# Altium PCB pcb.PcbDoc
Units mil, origin at the board's own origin, x right, y up, seen from the top; angles counter-clockwise.
Board outline 2500 x 3500 mil, 4 copper layers (Top, Top Inner, Bot Inner, Bot), stack 61.834 mil thick; 74 components, 64 nets, 256 pads, 540 vias.
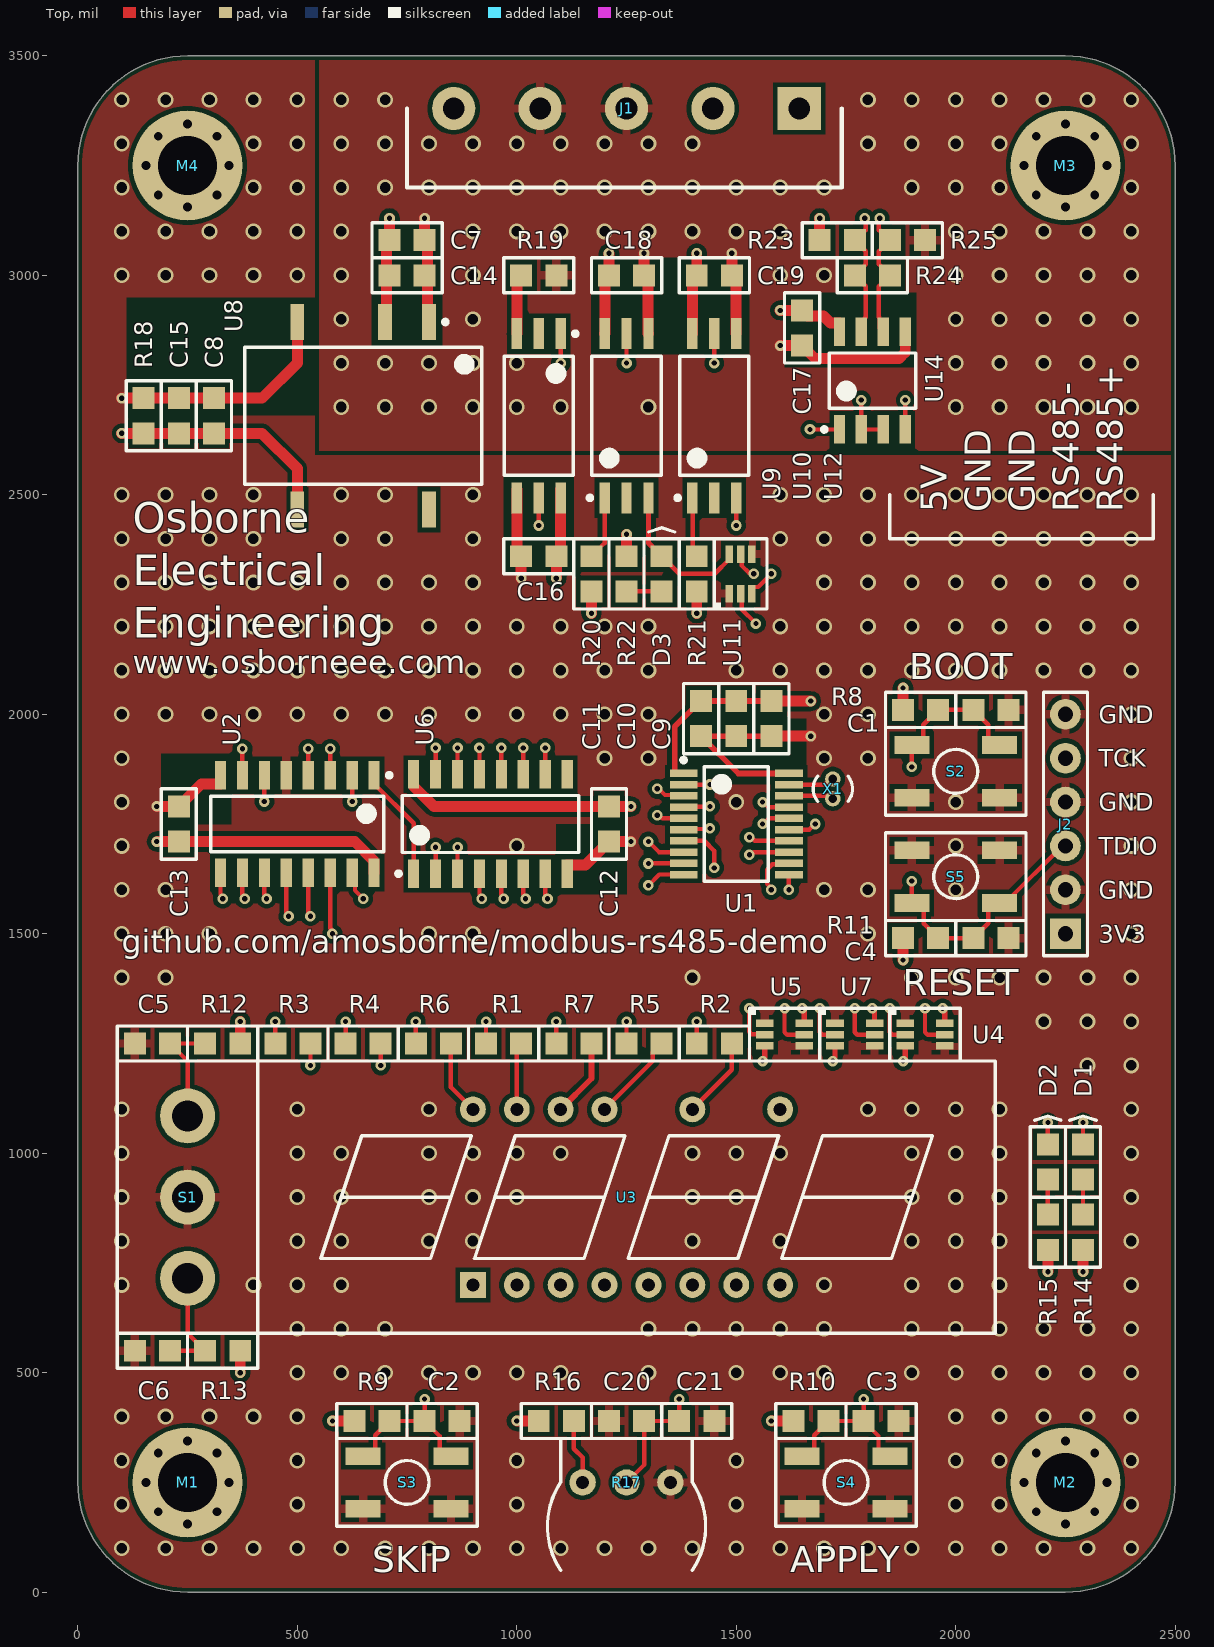
[diagram p0: Top view]
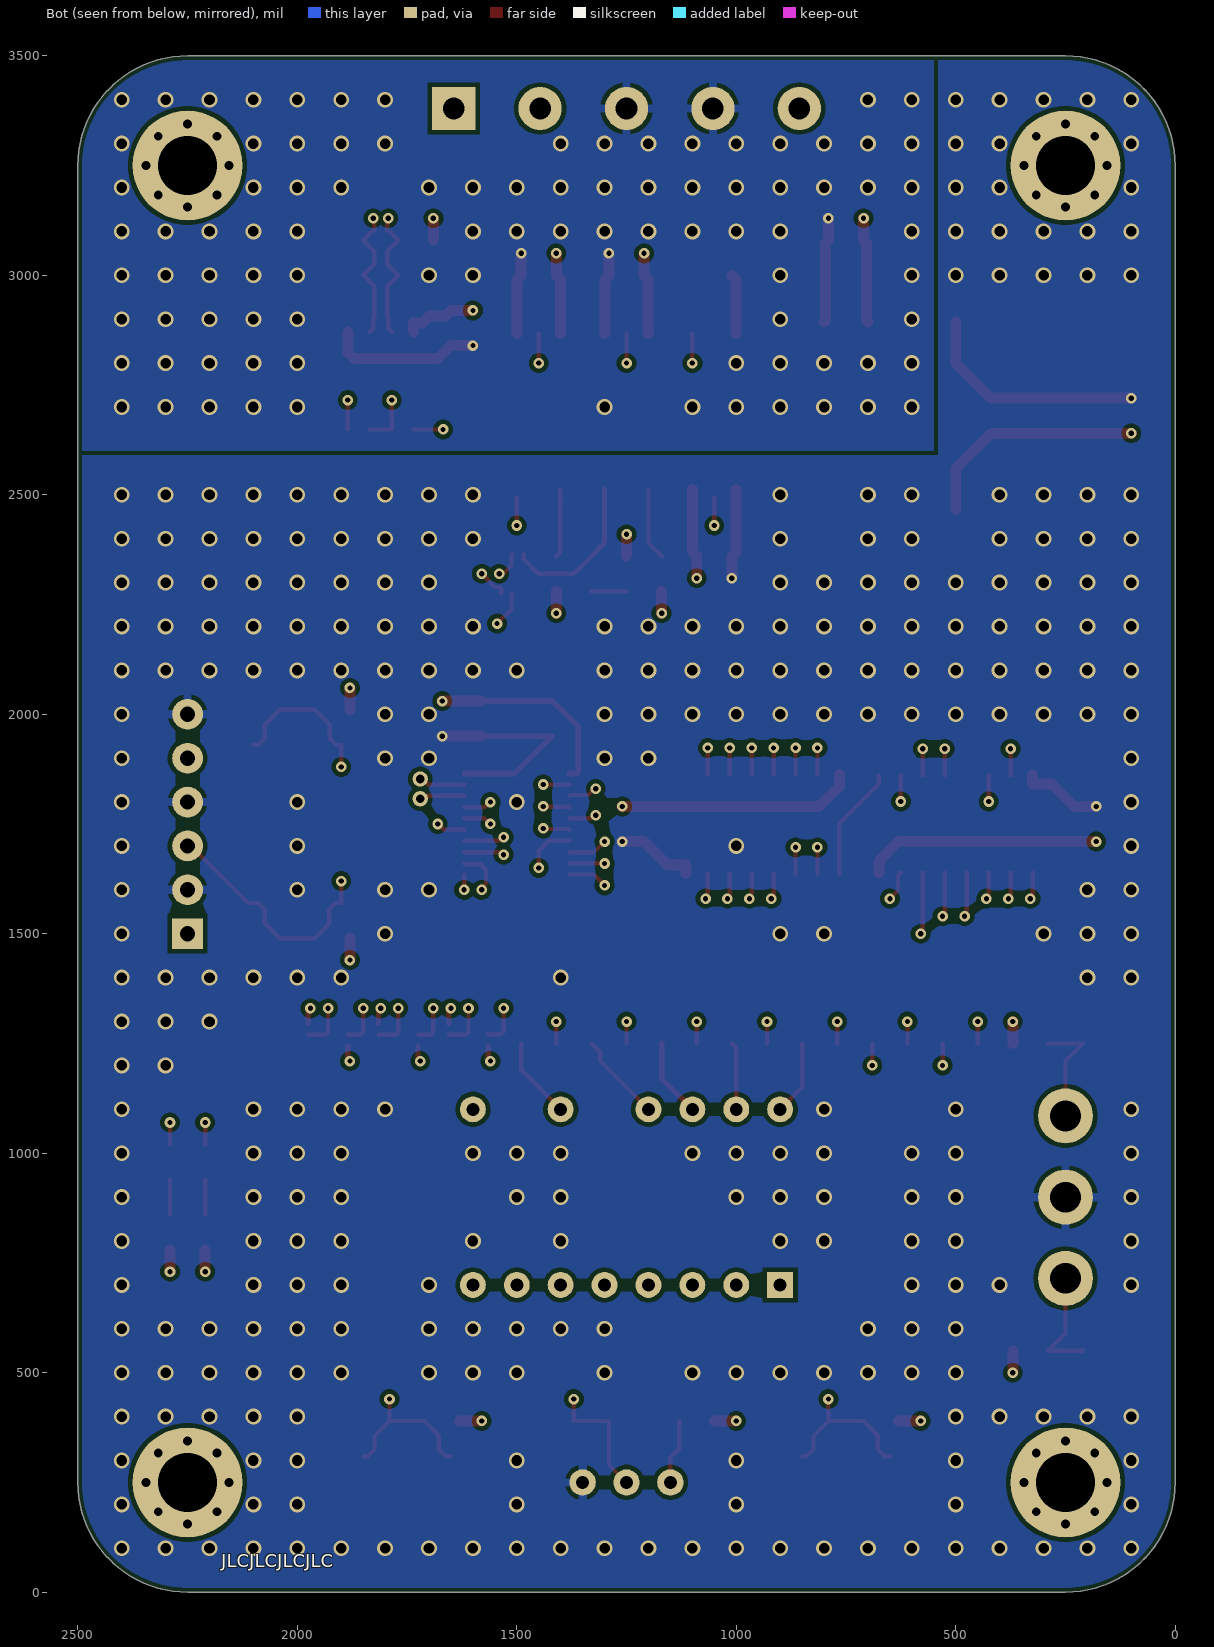
[diagram p1: Bot view, seen from below]
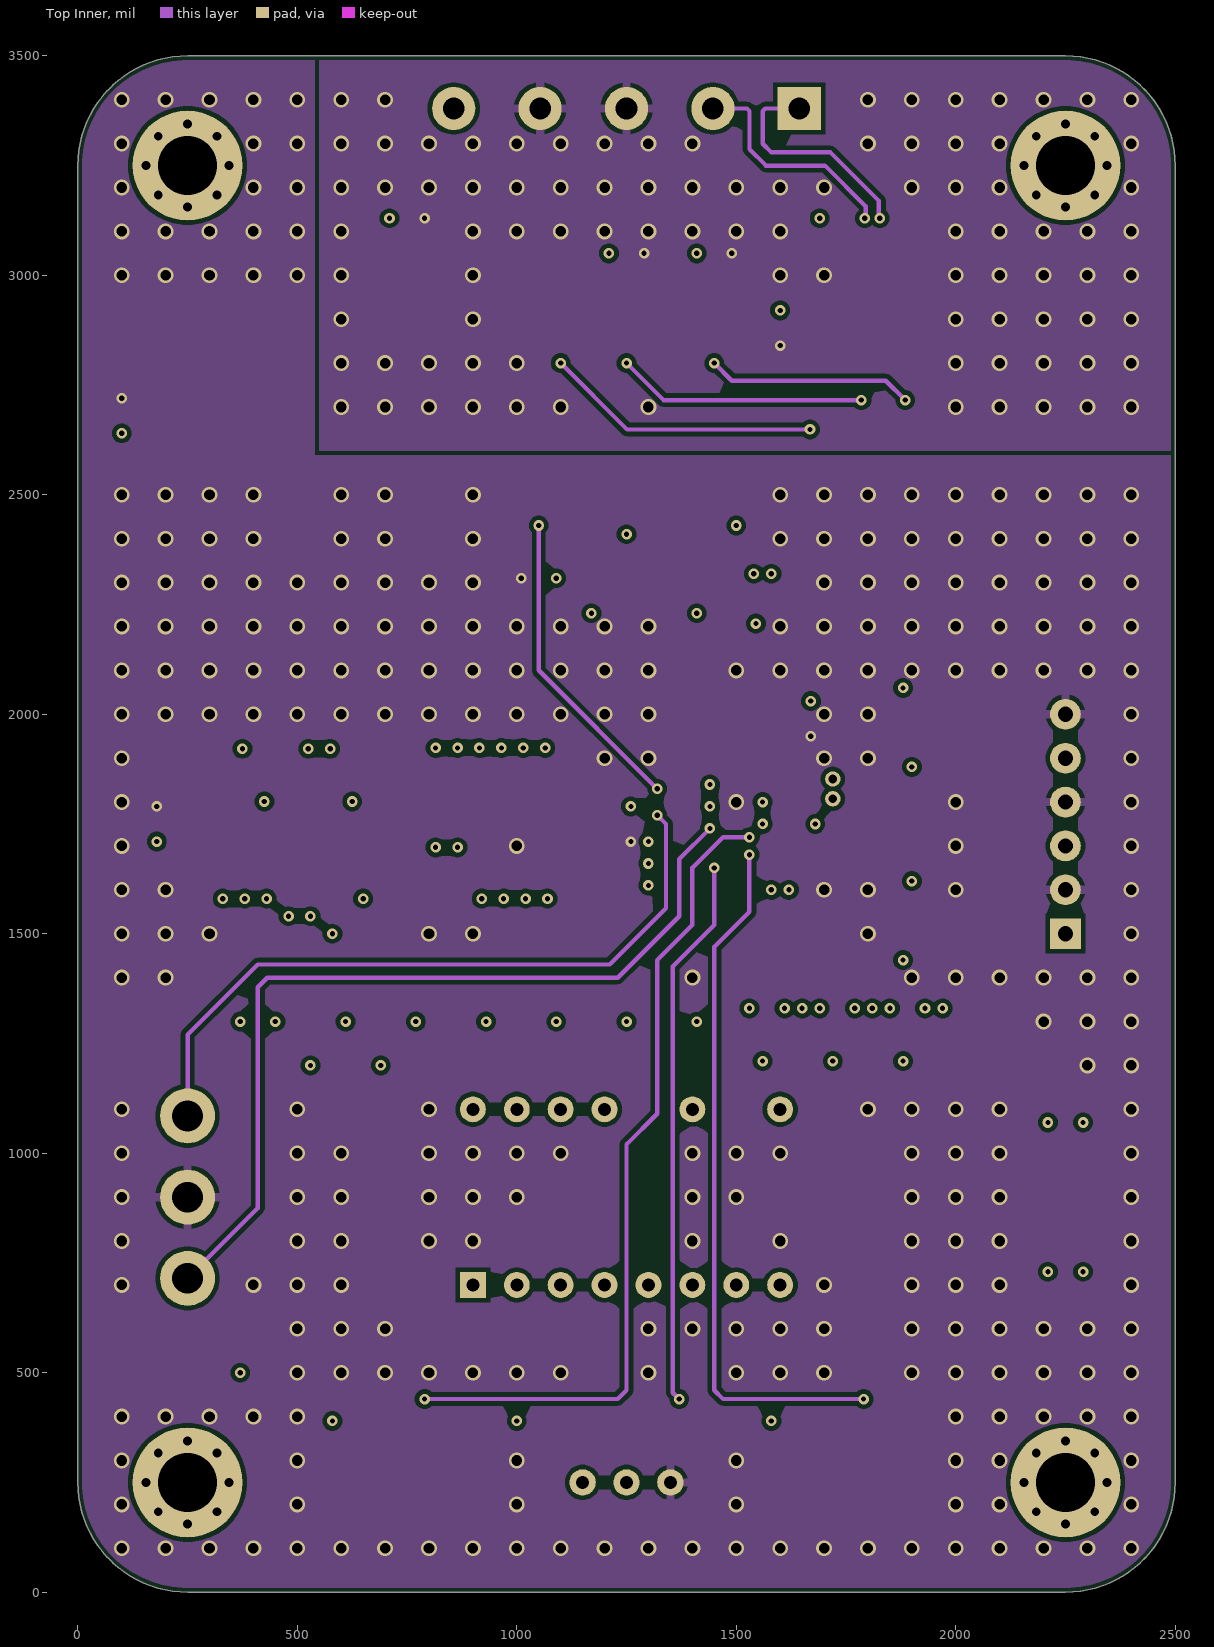
[diagram p2: Top Inner]
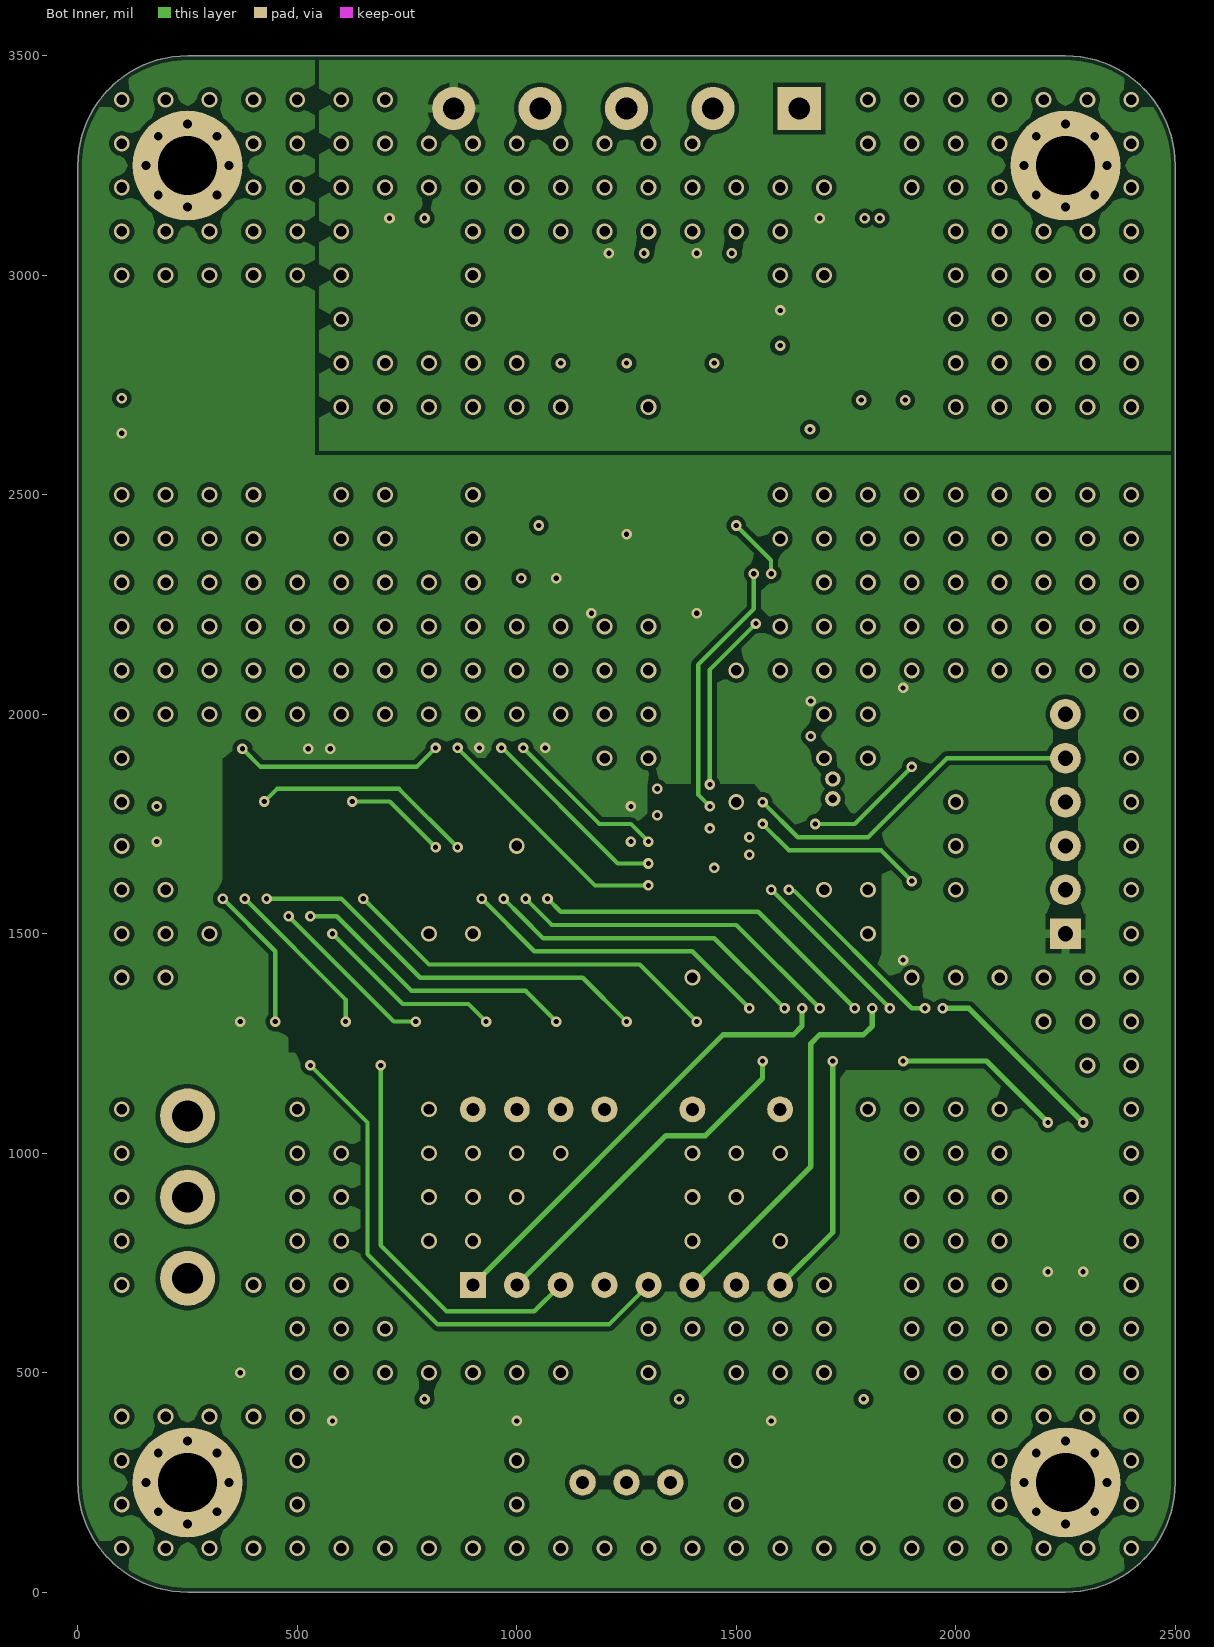
[diagram p3: Bot Inner]

## Layer stack, top to bottom
Top Solder: solder mask 0.5, Solder Resist, Dk 3.8
Top: signal copper 1.378
Dielectric Top Prepreg: prepreg 7.9, 7628, Dk 4.6
Top Inner: signal copper 0.689
Dielectric Core: core 41.9, 7628, Dk 4.6
Bot Inner: signal copper 0.689
Dielectric Bot Prepreg: prepreg 7.9, 7628, Dk 4.6
Bot: signal copper 1.378
Bottom Solder: solder mask 0.5, Solder Resist, Dk 3.8

## Board outline
0,250 ccw(c250,250) 250,0 2250,0 ccw(c2250,250) 2500,250 2500,3250 ccw(c2250,3250) 2250,3500 250,3500 ccw(c250,3250) 0,3250

## Design rules (kind name [scope] priority, off if disabled: settings)
BoardOutlineClearance [All] p1: gap=10 ignorepadtopadclearanceinfootprint=FALSE
Clearance [All] p1: gap=10 ignorepadtopadclearanceinfootprint=FALSE except(8: SMDPad-SMDPad)
DiffPairsRouting Netclass_100OHM [InDifferentialPairClass('100OHM')] p1: maxlimit=20 minlimit=20 mostfreqgap=20 toplayer_minwidth=10 toplayer_maxwidth=10 toplayer_prefwidth=10 midlayer1_minwidth=10 midlayer1_maxwidth=10 midlayer1_prefwidth=10 midlayer2_minwidth=10 midlayer2_maxwidth=10 midlayer2_prefwidth=10 bottomlayer_minwidth=10 bottomlayer_maxwidth=10 bottomlayer_prefwidth=10 impedanceprofiledriven=TRUE impedanceprofileid={6C01254F-D677-4FF3-B8FD-4BEEE3C65CCF} impedanceprofilevalue=100.000000 maxuncoupledlength=500
DiffPairsRouting Default_DiffPair [All] p2: maxlimit=10 minlimit=10 mostfreqgap=10 toplayer_minwidth=15 toplayer_maxwidth=15 toplayer_prefwidth=15 midlayer1_minwidth=15 midlayer1_maxwidth=15 midlayer1_prefwidth=15 midlayer2_minwidth=15 midlayer2_maxwidth=15 midlayer2_prefwidth=15 bottomlayer_minwidth=15 bottomlayer_maxwidth=15 bottomlayer_prefwidth=15 maxuncoupledlength=500
HoleSize [All] p1: absolutevalues=TRUE maxlimit=200 minlimit=8 maxpercent=80.000 minpercent=20.000
MinimumAnnularRing [All] p1: minimumring=6
MinimumSolderMaskSliver [All] p1: minsoldermaskwidth=4.5
PasteMaskExpansion [All] p1: expansion=-99999 usepaste=FALSE
PolygonConnect [All] p1: thpad.connectstyle=Relief thpad.reliefconductorwidth=20 thpad.reliefentries=4 thpad.polygonreliefangle="90 Angle" thpad.airgapwidth=10 smdpad.connectstyle=Relief smdpad.reliefconductorwidth=20 smdpad.reliefentries=4 smdpad.polygonreliefangle="90 Angle" smdpad.airgapwidth=10 via.connectstyle=Direct via.reliefconductorwidth=20 via.reliefentries=4 via.polygonreliefangle="90 Angle" via.airgapwidth=10
RoutingVias [All] p1: holewidth=12 width=24 viastyle="Through Hole" minholewidth=8 minwidth=20 maxholewidth=35 maxwidth=70
SilkToSilkClearance [All] p1: silktosilkclearance=4
SilkToSolderMaskClearance [IsPad] p1: minsilkscreentomaskgap=5 clearancetoexposedcopper=FALSE
SolderMaskExpansion [All] p1: expansion=2 istentingtop=FALSE
UnRoutedNet [All] p1: checkbadconnections=TRUE
Width Netclass_50OHM [InNetClass('50OHM')] p1: maxlimit=10 minlimit=10 preferedwidth=10 impedanceprofiledriven=TRUE impedanceprofileid={466D34C6-3B24-4C00-A7FA-295FB1FC6F6E} impedanceprofilevalue=50.000000 minimp=50.000000 maximp=50.000000 favimp=50.000000
Width Default_Width [All] p2: maxlimit=100 minlimit=3.5 preferedwidth=10
23 further rules are at their usual default settings.

## Classes and differential pairs
differential pair class 100OHM: RS485
net class 50OHM: APPLY_PUSH BOOT_PUSH LED_STAT_0 LED_STAT_1 NetU2_1 NetU2_2 NetU2_6 NetU2_7 NetU5_2 NetU5_5 NetU6_6 NetU6_7 NetU6_9 NetU9_1 NetU10_5 NetU12_5 POT_MEAS RX_DATA SBWTCK SBWTDIO SHIFT_RCLK SHIFT_SER SHIFT_SRCLK SKIP_PUSH TOGGLE_0 TOGGLE_1 TX_DATA TX_RXn_EN XIN XOUT
component class schematic: C1 C2 C3 C4 C5 C6 C9 C10 C11 C12 C13 C20 C21 D1 D2 J2 M1 M2 M3 M4 R1 R2 R3 R4 R5 R6 R7 R8 R9 R10 R11 R12 R13 R14 R15 R16 R17 S1 S2 S3 S4 S5 U1 U2 U3 U4 U5 U6 U7 X1
component class rs485_interface: C7 C8 C14 C15 C16 C17 C18 C19 D3 J1 R18 R19 R20 R21 R22 R23 R24 R25 U8 U9 U10 U11 U12 U14
differential pair RS485: +RS485_P -RS485_N

## Components (designator, comment, footprint, x,y, rotation, side; value= is the part's Value field where it differs from the comment)
C1 "CAP-CER-1N00-10T-100V-0805" C0805 2080,2010 r0 top value=1nF
C2 "CAP-CER-1N00-10T-100V-0805" C0805 830,390 r0 top value=1nF
C3 "CAP-CER-1N00-10T-100V-0805" C0805 1830,390 r0 top value=1nF
C4 "CAP-CER-1N00-10T-100V-0805" C0805 2080,1490 r0 top value=1nF
C5 "CAP-CER-1N00-10T-100V-0805" C0805 170,1250 r180 top value=1nF
C6 "CAP-CER-1N00-10T-100V-0805" C0805 170,550 r180 top value=1nF
C7 "CAP-CER-4U70-10T-25V-0805" C0805 750,3080 r0 top value=4.7uF
C8 "CAP-CER-10U0-10T-16V-0805" C0805 310,2680 r90 top value=10uF
C9 "CAP-CER-4U70-10T-25V-0805" C0805 1580,1990 r270 top value=4.7uF
C10 "CAP-CER-100N-10T-100V-0805" C0805 1500,1990 r270 top value=100nF
C11 "CAP-CER-100N-10T-100V-0805" C0805 1420,1990 r270 top value=100nF
C12 "CAP-CER-100N-10T-100V-0805" C0805 1210,1750 r270 top value=100nF
C13 "CAP-CER-100N-10T-100V-0805" C0805 230,1750 r90 top value=100nF
C14 "CAP-CER-100N-10T-100V-0805" C0805 750,3000 r0 top value=100nF
C15 "CAP-CER-100N-10T-100V-0805" C0805 230,2680 r90 top value=100nF
C16 "CAP-CER-100N-10T-100V-0805" C0805 1050,2360 r180 top value=100nF
C17 "CAP-CER-100N-10T-100V-0805" C0805 1650,2880 r270 top value=100nF
C18 "CAP-CER-100N-10T-100V-0805" C0805 1250,3000 r0 top value=100nF
C19 "CAP-CER-100N-10T-100V-0805" C0805 1450,3000 r0 top value=100nF
C20 "CAP-CER-100N-10T-100V-0805" C0805 1250,390 r180 top value=100nF
C21 "CAP-CER-1N00-10T-100V-0805" C0805 1410,390 r0 top value=1nF
D1 "LED_RED" D0805 2290,980 r270 top
D2 "LED_GREEN" D0805 2210,980 r270 top
D3 "LED_BLUE" D0805 1330,2320 r270 top
J1 "TBLOCK_5POS" TBLOCK_5POS 1250,3380 r180 top
J2 "HEADER_1X6" Header_1x6 2250,1500 r90 top
M1 "MTG_HOLE" MTG_HOLE_No4 250,250 r0 top
M2 "MTG_HOLE" MTG_HOLE_No4 2250,250 r0 top
M3 "MTG_HOLE" MTG_HOLE_No4 2250,3250 r0 top
M4 "MTG_HOLE" MTG_HOLE_No4 250,3250 r0 top
R1 "RES-180R-1T00-W125-0805" R0805 970,1250 r0 top value=180Ω
R2 "RES-180R-1T00-W125-0805" R0805 1450,1250 r0 top value=180Ω
R3 "RES-180R-1T00-W125-0805" R0805 490,1250 r0 top value=180Ω
R4 "RES-180R-1T00-W125-0805" R0805 650,1250 r0 top value=180Ω
R5 "RES-180R-1T00-W125-0805" R0805 1290,1250 r0 top value=180Ω
R6 "RES-180R-1T00-W125-0805" R0805 810,1250 r0 top value=180Ω
R7 "RES-180R-1T00-W125-0805" R0805 1130,1250 r0 top value=180Ω
R8 "RES-47K0-1T00-W125-0805" R0805 1920,2010 r0 top value=47kΩ
R9 "RES-47K0-1T00-W125-0805" R0805 670,390 r0 top value=47kΩ
R10 "RES-47K0-1T00-W125-0805" R0805 1670,390 r0 top value=47kΩ
R11 "RES-47K0-1T00-W125-0805" R0805 1920,1490 r0 top value=47kΩ
R12 "RES-47K0-1T00-W125-0805" R0805 330,1250 r180 top value=47kΩ
R13 "RES-47K0-1T00-W125-0805" R0805 330,550 r180 top value=47kΩ
R14 "RES-120R-1T00-W125-0805" R0805 2290,820 r90 top value=120Ω
R15 "RES-200R-1T00-W125-0805" R0805 2210,820 r90 top value=200Ω
R16 "RES-47K0-1T00-W125-0805" R0805 1090,390 r0 top value=47kΩ
R17 "RES-50K0-TRIMMER" 3352T_TRIMPOT 1250,250 r180 top value=50kΩ
R18 "RES-120R-1T00-W125-0805" R0805 150,2680 r90 top value=120Ω
R19 "RES-680R-1T00-W125-0805" R0805 1050,3000 r0 top value=680Ω
R20 "RES-680R-1T00-W125-0805" R0805 1170,2320 r90 top value=680Ω
R21 "RES-680R-1T00-W125-0805" R0805 1410,2320 r90 top value=680Ω
R22 "RES-24R0-1T00-W125-0805" R0805 1250,2320 r270 top value=24Ω
R23 "RES-750R-1T00-W125-0805" R0805 1730,3080 r0 top value=750Ω
R24 "RES-120R-1T00-W125-0805" R0805 1810,3000 r0 top value=120Ω
R25 "RES-750R-1T00-W125-0805" R0805 1890,3080 r0 top value=750Ω
S1 "SPDT-TOGGLE-SWITCH" AST13SNCQ 250,900 r0 top
S2 "PTS647" PTS647 2000,1870 r0 top
S3 "PTS647" PTS647 750,250 r0 top
S4 "PTS647" PTS647 1750,250 r0 top
S5 "PTS647" PTS647 2000,1630 r180 top
U1 "MSP430G2553" MSP430G2553_TSSOP-20 1500,1750 r0 top
U2 "CD54HC4511" CD54HC4511_SOIC-16 500,1750 r270 top
U3 "QUAD-7SEG-DISP" LTC-4727 1250,900 r0 top
U4 "UM6K34N" UM6K34N_SC-88 1930,1270 r0 top
U5 "UM6K34N" UM6K34N_SC-88 1610,1270 r0 top
U6 "74HC594D" 74HC594D_SOIC-16 940,1750 r90 top
U7 "UM6K34N" UM6K34N_SC-88 1770,1270 r0 top
U8 "B0503XT-1WR3" B05_XT-1WR3 650,2680 r270 top
U9 "TLP2710" TLP2710_SO-6L 1050,2680 r270 top
U10 "TLP2710" TLP2710_SO-6L 1250,2680 r90 top
U11 "UM6K34N" UM6K34N_SC-88 1510,2320 r90 top
U12 "TLP2710" TLP2710_SO-6L 1450,2680 r90 top
U14 "ST485B" ST485B_SO-8 1810,2760 r90 top
X1 "830014219B" CRYSTAL_THT_2X6 1720,1830 r270 top

## Footprints (in the part's own frame and the unit in brackets; to place one, negate y for a bottom-side part, rotate by r counter-clockwise, add the part's x,y. Pads: shape width x height; smd on the part's side, far side on the other; paste and mask are expansions set on the pad)
74HC594D_SOIC-16 [mm] "SOIC, 16-Leads, Body 9.95x3.90mm, Pitch 1.27mm, IPC Low Density"
  rect 1.65x0.65 smd: 1(-2.875,4.445) 2(-2.875,3.175) 3(-2.875,1.905) 4(-2.875,0.635) 5(-2.875,-0.635) 6(-2.875,-1.905) 7(-2.875,-3.175) 8(-2.875,-4.445) 9(2.875,-4.445) 10(2.875,-3.175) 11(2.875,-1.905) 12(2.875,-0.635) 13(2.875,0.635) 14(2.875,1.905) 15(2.875,3.175) 16(2.875,4.445)
  silkscreen extent -3,-5.1 1.65,5.44, body extent -3,-5.1 3,5.1, height 1.75
3352T_TRIMPOT [mil]
  round 60 hole 30: 1(100,0) 2(0,0) 3(-100,0)
  silkscreen extent -180,-100 180,200
AST13SNCQ [mil]
  round 125 hole 70: 1(0,-185.04) 2(0,0) 3(0,185.04)
  silkscreen extent -160,-310 160,310
B05_XT-1WR3 [mm] "CFP, 8-Leads, Body 13.70x8.75mm (max), Pitch 2.54mm, IPC Low Density"
  rect 2.1x0.8 smd: 1(-5.425,3.81) 2(-5.425,1.27) 4(-5.425,-3.81) 5(5.425,-3.81) 8(5.425,3.81)
  silkscreen extent -5.55,-6.85 3.97,6.85, body extent -5.85,-6.85 5.85,6.85, height 7.5
C0805 [mil]
  rect 50x50 smd: 1(-40,0) 2(40,0)
  silkscreen extent -80,-40 80,40, body extent -40,-20 40,20, height 50
CD54HC4511_SOIC-16 [mm] "SOIC, 16-Leads, Body 9.90x3.90mm, Pitch 1.27mm, IPC Low Density"
  rect 1.65x0.65 smd: 1(-2.825,4.445) 2(-2.825,3.175) 3(-2.825,1.905) 4(-2.825,0.635) 5(-2.825,-0.635) 6(-2.825,-1.905) 7(-2.825,-3.175) 8(-2.825,-4.445) 9(2.825,-4.445) 10(2.825,-3.175) 11(2.825,-1.905) 12(2.825,-0.635) 13(2.825,0.635) 14(2.825,1.905) 15(2.825,3.175) 16(2.825,4.445)
  silkscreen extent -2.95,-5 1.6,5.45, body extent -3,-5 3,5, height 1.75
CRYSTAL_THT_2X6 [mil]
  round 35 hole 20: 1(-22.5,0) 2(22.5,0)
  silkscreen extent -29,-45 29,45
D0805 [mil]
  rect 50x50 smd: 1(-40,0) 2(40,0)
  silkscreen extent -105,-40 80,40, body extent -40,-20 40,20, height 50
Header_1x6 [mil]
  rect 70x70 hole 35: 1(0,0)
  round 70 hole 35: 2(100,0) 3(200,0) 4(300,0) 5(400,0) 6(500,0)
  silkscreen extent -50,-50 550,50
LTC-4727 [mm] "Four Digit, Seven Segment Display"
  rect 1.5x1.5 hole 0.75: 1(-8.89,-5.08)
  round 1.5 hole 0.75: 2(-6.35,-5.08) 3(-3.81,-5.08) 4(-1.27,-5.08) 5(1.27,-5.08) 6(3.81,-5.08) 7(6.35,-5.08) 8(8.89,-5.08) 9(8.89,5.08) 11(3.81,5.08) 13(-1.27,5.08) 14(-3.81,5.08) 15(-6.35,5.08) 16(-8.89,5.08)
  silkscreen extent -21.34,-7.87 21.34,7.87
MSP430G2553_TSSOP-20 [mil] "TSOP, 20-Leads, Body 6.50x4.40mm, Pitch 0.65mm, IPC Low Density"
  rect 63x17 smd: 1(-120,115.16) 2(-120,89.57) 3(-120,63.98) 4(-120,38.39) 5(-120,12.8) 6(-120,-12.8) 7(-120,-38.39) 8(-120,-63.98) 9(-120,-89.57) 10(-120,-115.16) 11(120,-115.16) 12(120,-89.57) 13(120,-63.98) 14(120,-38.39) 15(120,-12.8) 16(120,12.8) 17(120,38.39) 18(120,63.98) 19(120,89.57) 20(120,115.16)
  silkscreen extent -125,-130 73,151, body extent -126,-130 126,130, height 47
MTG_HOLE_No4 [mil]
  round 250 hole 135: 1(0,0)
PTS647 [mil]
  rect 80x40 smd: 1(-100,60) 2(100,60) 3(-100,-60) 4(100,-60)
  silkscreen extent -160,-100 160,100
R0805 [mil]
  rect 50x50 smd: 1(-40,0) 2(40,0)
  silkscreen extent -80,-40 80,40, body extent -40,-20 40,20, height 20
ST485B_SO-8 [mm] "SOIC, 8-Leads, Body 4.90x3.90mm, Pitch 1.27mm, IPC Low Density"
  rect 1.65x0.65 smd: 1(-2.825,1.905) 2(-2.825,0.635) 3(-2.825,-0.635) 4(-2.825,-1.905) 5(2.825,-1.905) 6(2.825,-0.635) 7(2.825,0.635) 8(2.825,1.905)
  silkscreen extent -2.95,-2.5 1.6,2.9, body extent -3,-2.5 3,2.5, height 1.75
TBLOCK_5POS [mm]
  rect 2.5x2.5 hole 1.25: 1(-10,0)
  round 2.5 hole 1.25: 2(-5,0) 3(0,0) 4(5,0) 5(10,0)
  silkscreen extent -12.45,0 12.7,4.57
TLP2710_SO-6L [mm] "SOIC, 6-Leads, Body 3.84x7.50mm, Pitch 1.27mm, IPC Low Density"
  rect 1.8x0.6 smd: 1(-4.75,1.27) 2(-4.75,0) 3(-4.75,-1.27) 4(4.75,-1.27) 5(4.75,0) 6(4.75,1.27)
  silkscreen extent -4.87,-2 3.45,2.25, body extent -5,-2 5,2, height 2.2
UM6K34N_SC-88 [mil] "SOT23, 6-Leads, Body 2.00x2.10mm, Pitch 0.65mm, IPC Low Density"
  rect 40x17 smd: 1(-45,25.59) 2(-45,0) 3(-45,-25.59) 4(45,-25.59) 5(45,0) 6(45,25.59)
  silkscreen extent -80,-60 80,60, body extent -43,-41 43,41, height 39

## Part data
C1 C2 C3 C4 C5 C6 C21: "CAP, CER, 1nF ±10%, 100V, 0805", Supplier Part Number 1=732-12102-1-ND, Tolerance=10%, Voltage=100V, Supplier 1=Digi-Key
C7 C9: "CAP, CER, 4.7uF ±10%, 25V, 0805", Supplier Part Number 1=1276-2969-1-ND, Tolerance=10%, Voltage=25V, Supplier 1=Digi-Key
C8: "CAP, CER, 10uF ±10%, 16V, 0805", Supplier Part Number 1=1276-2872-1-ND, Tolerance=10%, Voltage=16V, Supplier 1=Digi-Key
C10 C11 C12 C13 C14 C15 C16 C17 C18 C19 C20: "CAP, CER, 100nF ±10%, 100V, 0805", Supplier Part Number 1=732-12244-1-ND, Tolerance=10%, Voltage=100V, Supplier 1=Digi-Key
D1: "Red LED Indicator 0805", Supplier Part Number 1=732-4984-1-ND, Supplier 1=Digi-Key
D2: "Green LED Indicator 0805", Supplier Part Number 1=732-4983-1-ND, Supplier 1=Digi-Key
D3: "Blue LED Indicator 0805", Supplier Part Number 1=732-4982-1-ND, Supplier 1=Digi-Key
J1: "Screw Terminal Block, 5-Position"
J2: "Header, 1-Row, 6-Position"
M1 M2 M3 M4: "Mounting Hole"
R1 R2 R3 R4 R5 R6 R7: "RES, 180Ω ±1.00%, 125mW, 0805", Power=125mW, Supplier Part Number 1=13-RT0805FRE07180RLCT-ND, Tolerance=1%, Supplier 1=Digi-Key
R8 R9 R10 R11 R12 R13 R16: "RES, 47.0kΩ ±1.00%, 125mW, 0805", Power=125mW, Supplier Part Number 1=A129769CT-ND, Tolerance=1%, Supplier 1=Digi-Key
R14 R18 R24: "RES, 120Ω ±1.00%, 125mW, 0805", Power=125mW, Supplier Part Number 1=A129738CT-ND, Tolerance=1%, Supplier 1=Digi-Key
R15: "RES, 200Ω ±1.00%, 125mW, 0805", Power=125mW, Supplier Part Number 1=13-RT0805FRE07200RLCT-ND, Tolerance=1%, Supplier 1=Digi-Key
R17: "50kOhm Thumbwheel Potentiometer", Supplier Part Number 1=3352T-503LF-ND, Supplier 1=Digi-Key
R19 R20 R21: "RES, 680Ω ±1.00%, 125mW, 0805", Power=125mW, Supplier Part Number 1=RMCF0805FT680RCT-ND, Tolerance=1%, Supplier 1=Digi-Key
R22: "RES, 24Ω ±1.00%, 125mW, 0805", Power=125mW, Supplier Part Number 1=541-24.0CCT-ND, Tolerance=1%, Supplier 1=Digi-Key
R23 R25: "RES, 750Ω ±1.00%, 125mW, 0805", Power=125mW, Supplier Part Number 1=13-RT0805FRE07750RLCT-ND, Tolerance=1%, Supplier 1=Digi-Key
S1: "SPDT Toggle Switch, On-Off-On, Through Hole", Supplier Part Number 1=2449-AST13SNCQ-ND, Supplier 1=Digi-Key
S2 S3 S4 S5: "PTS647 Series Tactile Switch", Supplier Part Number 1=PTS647SN70SMTR2LFSCT-ND, Supplier 1=Digi-Key
U1: "MSP430 16-BIT, 16KB FLASH, 20-TSSOP", Supplier Part Number 1=296-28430-1-ND, Supplier 1=Digi-Key
U2: "BCD Decoder, 7-Segment Display Driver", Supplier Part Number 1=296-CD74HC4511MTCT-ND, Supplier 1=Digi-Key
U3: "Quad 7-Segment Display, Common Cathode", Supplier Part Number 1=160-1551-5-ND, Supplier 1=Digi-Key, Supplier 2=Digi-Key, Supplier Part Number 2=160-1547-5-ND
U4 U5 U7 U11: "NCH+NCH 50V 200mA Small Signal MOSFET", Supplier Part Number 1=UM6K34NTCNCT-ND, Supplier 1=Digi-Key
U6: "Shift Register, 8-Bit", Supplier Part Number 1=74HC594DCT-ND, Supplier 1=Digi-Key
U8: "Isolated DC/DC, 5Vin, 3.3Vout, 300mA", Supplier Part Number 1=2725-B0503XT-1WR3-ND, Supplier 1=Digi-Key
U9 U10 U12: "Logic Output Optoisolator 5MBd", Supplier Part Number 1=TLP2710(TP4ECT-ND, Supplier 1=Digi-Key
U14: "1/1 RS485 Transceiver, Half-Duplex", Supplier Part Number 1=497-3733-1-ND, Supplier 1=Digi-Key
X1: "32.768kHz Tuning Fork Crystal, 6pF", Capacitance=6pF, Frequency=32.768kHz, Supplier Part Number 1=1923-830014219B-ND, Supplier 1=Digi-Key

## Via types
v1: diameter 36, hole 24, Top to Bot, tented both sides, 396 vias
v2: diameter 24, hole 12, Top to Bot, tented both sides, 112 vias
v3: diameter 44, hole 20, Top to Bot, tented both sides, 32 vias

## Nets (pads, with @x,y where several pads share a name; then routed paths per layer and width w, separated by ;. In a path a pad name is that pad's centre, name@x,y a point inside that pad or via, vN(x,y) a via of type N, cw(c..) or ccw(c..) an arc to the next point about the centre after c; other vN are vias at no path point)
APPLY_PUSH: C3.1 R10.2 S4.1 S4.2 U1.13 | length 2047.3
  Top w10: v2(1530,1680) 1533.79,1680 1539.81,1686.02 U1.13 ; S4.1 1662.5,310 1677.5,325 1677.5,357.5 R10.2 C3.1 ; v2(1790,440) C3.1 ; S4.2 1839.14,310 1824.14,325 1824.14,355.86 C3.1
  Top Inner w10: v2(1530,1680) 1530,1550 1450,1470 1450,460 1470,440 v2(1790,440)
BOOT_PUSH: C1.1 R8.2 S2.1 S2.2 U1.15 | length 691.6
  Top w10: U1.15 1666.5,1737.2 1679.3,1750 v2(1680,1750) ; v2(1900,1880) S2.1 1910.86,1930 1925.86,1945 1925.86,1975.86 R8.2 C1.1 2074.14,1975.86 2074.14,1945 2089.14,1930 S2.2
  Bot Inner w10: v2(1680,1750) 1770,1750 v2(1900,1880)
GND: C1.2 C2.2 C3.2 C4.2 C5.2 C6.2 C8.2 C9.2 C10.2 C11.2 C12.2 C13.2 C15.2 C16.2 C20.2 C21.2 J2.2 J2.4 J2.6 R17.3 R18.2 S1.2 S2.3 S2.4 S3.3 S3.4 S4.3 S4.4 S5.3 S5.4 U1.20 U2.5 U2.8 U4.1 U4.4 U5.1 U5.4 U6.8 U7.1 U7.4 U8.4 U9.4 U11.1 U11.4 | length 1591.9
  Top w13: C9.2 C10.2 C11.2 1504.84,1865.16 U1.20
  Top w25: v2(100,2720) R18.2 C15.2 420,2720 500,2800 U8.4 ; v2(180,1790) C13.2 281.24,1841.24 324.7,1841.24 325,1841.54 U2.8 ; U9.4 U9.4@1000.69,2492.3 ; U9.4@1000.69,2512.3 1000.69,2369.31 C16.2 v2(1010,2310) ; U6.8 1115,1656.5 1115.3,1656.79 1156.79,1656.79 C12.2 v2(1260,1710) ; C9.2 v2(1670,1950)
  other v1: 100,100 200,100 300,100 400,100 500,100 600,100 700,100 800,100 900,100 1000,100 1100,100 1200,100 1300,100 1400,100 1500,100 1600,100 1700,100 1800,100 1900,100 2000,100 2100,100 2200,100 2300,100 2400,100 100,200 500,200 1000,200 1500,200 2000,200 2100,200 2400,200 100,300 500,300 1000,300 1500,300 2000,300 2100,300 2400,300 100,400 200,400 300,400 400,400 500,400 2000,400 2100,400 2200,400 2300,400 2400,400 500,500 600,500 700,500 800,500 900,500 1000,500 1100,500 1300,500 1500,500 1600,500 1700,500 1900,500 2000,500 2100,500 2200,500 2300,500 2400,500 500,600 600,600 700,600 1300,600 1400,600 1500,600 1600,600 1700,600 1900,600 2000,600 2100,600 2200,600 2300,600 2400,600 100,700 400,700 500,700 600,700 1700,700 1900,700 2000,700 2100,700 2400,700 100,800 500,800 600,800 800,800 900,800 1400,800 1600,800 1900,800 2000,800 2100,800 2400,800 100,900 500,900 600,900 800,900 900,900 1000,900 1400,900 1500,900 1900,900 2000,900 2100,900 2400,900 100,1000 500,1000 600,1000 800,1000 900,1000 1000,1000 1100,1000 1400,1000 1500,1000 1600,1000 1900,1000 2000,1000 2100,1000 2400,1000 100,1100 500,1100 800,1100 1800,1100 1900,1100 2000,1100 2100,1100 2400,1100 2300,1200 2400,1200 2200,1300 2300,1300 2400,1300 100,1400 200,1400 1400,1400 1900,1400 2000,1400 2100,1400 2200,1400 2300,1400 2400,1400 100,1500 200,1500 300,1500 800,1500 900,1500 1800,1500 2400,1500 100,1600 200,1600 1700,1600 1800,1600 2000,1600 2400,1600 100,1700 1000,1700 2000,1700 2400,1700 100,1800 1500,1800 2000,1800 2400,1800 100,1900 1200,1900 1300,1900 1700,1900 1800,1900 2400,1900 100,2000 200,2000 300,2000 400,2000 500,2000 600,2000 700,2000 800,2000 900,2000 1000,2000 1100,2000 1200,2000 1300,2000 1700,2000 1800,2000 2400,2000 100,2100 200,2100 300,2100 400,2100 500,2100 600,2100 700,2100 800,2100 900,2100 1000,2100 1100,2100 1200,2100 1300,2100 1500,2100 1600,2100 1700,2100 1800,2100 1900,2100 2000,2100 2100,2100 2200,2100 2300,2100 2400,2100 100,2200 200,2200 300,2200 400,2200 500,2200 600,2200 700,2200 800,2200 900,2200 1000,2200 1100,2200 1200,2200 1300,2200 1600,2200 1700,2200 1800,2200 1900,2200 2000,2200 2100,2200 2200,2200 2300,2200 2400,2200 100,2300 200,2300 300,2300 400,2300 500,2300 600,2300 700,2300 800,2300 900,2300 1700,2300 1800,2300 1900,2300 2000,2300 2100,2300 2200,2300 2300,2300 2400,2300 100,2400 200,2400 300,2400 400,2400 600,2400 700,2400 900,2400 1600,2400 1700,2400 1800,2400 1900,2400 2000,2400 2100,2400 2200,2400 2300,2400 2400,2400 100,2500 200,2500 300,2500 400,2500 600,2500 700,2500 900,2500 1600,2500 1700,2500 1800,2500 1900,2500 2000,2500 2100,2500 2200,2500 2300,2500 2400,2500 100,3000 200,3000 300,3000 400,3000 500,3000 100,3100 200,3100 300,3100 400,3100 500,3100 100,3200 400,3200 500,3200 100,3300 400,3300 500,3300 100,3400 200,3400 300,3400 400,3400 500,3400
ISO: C7.2 C14.2 C17.2 C18.2 C19.2 J1.3 J1.4 R19.2 R25.2 U8.1 U10.4 U12.4 U14.5 | length 964.9
  Top w25: v2(790,3130) C7.2 796.75,3073.25 796.75,2896.83 U8.1 ; v2(1290,3050) C18.2 1299.31,2990.69 1299.31,2867.7 U10.4 ; v2(1490,3050) C19.2 1499.31,2990.69 1499.31,2867.7 U12.4 ; v2(1600,2840) C17.2 1680,2810 1870.36,2810 1885,2824.64 U14.5
  other v1: 600,2700 700,2700 800,2700 900,2700 1000,2700 1100,2700 1300,2700 2000,2700 2100,2700 2200,2700 2300,2700 2400,2700 600,2800 700,2800 800,2800 900,2800 1000,2800 2000,2800 2100,2800 2200,2800 2300,2800 2400,2800 600,2900 900,2900 2000,2900 2100,2900 2200,2900 2300,2900 2400,2900 600,3000 900,3000 1600,3000 1700,3000 2000,3000 2100,3000 2200,3000 2300,3000 2400,3000 600,3100 900,3100 1000,3100 1100,3100 1200,3100 1300,3100 1400,3100 1500,3100 1600,3100 2000,3100 2100,3100 2200,3100 2300,3100 2400,3100 600,3200 700,3200 800,3200 900,3200 1000,3200 1100,3200 1200,3200 1300,3200 1400,3200 1500,3200 1600,3200 1700,3200 1900,3200 2000,3200 2100,3200 2400,3200 600,3300 700,3300 800,3300 900,3300 1000,3300 1100,3300 1200,3300 1300,3300 1400,3300 1800,3300 1900,3300 2000,3300 2100,3300 2400,3300 600,3400 700,3400 1800,3400 1900,3400 2000,3400 2100,3400 2200,3400 2300,3400 2400,3400
LED_STAT_0: U1.12 U4.2 | length 579.6
  Top w10: v2(1580,1600) 1580,1603.79 1570,1613.79 1570,1646.06 1582.29,1658.34 1617.91,1658.34 U1.12 ; v2(1850,1330) 1850,1275.86 1855.86,1270 U4.2
  Bot Inner w10: v2(1580,1600) v2(1850,1330)
LED_STAT_1: U1.11 U4.5 | length 558.2
  Top w10: v2(1620,1600) U1.11 ; v2(1930,1330) 1930,1275.86 1935.86,1270 U4.5
  Bot Inner w10: v2(1620,1600) 1622.68,1597.32 1632.68,1597.32 1900,1330 v2(1930,1330)
NetD1_1: D1.1 U4.6 | length 514.2
  Top w10: D1.1 v2(2290,1070)
  Top w12: v2(1970,1330) 1970,1326.75 1975,1321.75 U4.6
  Bot Inner w12: v2(1970,1330) 2030,1330 v2(2290,1070)
NetD1_2: D1.2 R14.2 | length 80
  Top w10: R14.2 D1.2
NetD2_1: D2.1 U4.3 | length 474.5
  Top w10: D2.1 v2(2210,1070)
  Top w12: v2(1880,1210) 1880,1213.25 1885,1218.25 U4.3
  Bot Inner w12: v2(1880,1210) 2070,1210 v2(2210,1070)
NetD2_2: D2.2 R15.2 | length 80
  Top w10: R15.2 D2.2
NetD3_1: D3.1 U10.3 U11.6 | length 361.8
  Top w10: D3.1 1370,2320 1450.91,2320 1484.41,2353.5 U11.6
  Top w12: U10.3@1300,2512.99 1300,2390 D3.1
NetD3_2: D3.2 R22.2 | length 80
  Top w10: R22.2 D3.2
NetR1_1: R1.1 U2.14 | length 623.7
  Top w10: U2.14 575,1512.86 577.32,1510.54 577.32,1502.68 v2(580,1500) ; R1.1 v2(930,1300)
  Bot Inner w10: v2(580,1500) 740,1340 890,1340 v2(930,1300)
NetR1_2: R1.2 U3.15 | length 154.1
  Top w10: U3.15 1000,1240 R1.2
NetR2_1: R2.1 U2.15 | length 995.1
  Top w10: U2.15 631.44,1632.34 631.44,1598.74 650,1580.18 v2(650,1580) ; R2.1 v2(1410,1300)
  Bot Inner w10: v2(650,1580) 800,1430 1280,1430 v2(1410,1300)
NetR2_2: R2.2 U3.11 | length 187.3
  Top w10: U3.11 1490,1190 R2.2
NetR3_1: R3.1 U2.9 | length 440.6
  Top w10: U2.9 325,1588.79 330,1583.79 v2(330,1580) ; R3.1 v2(450,1300)
  Bot Inner w10: v2(330,1580) 450,1460 v2(450,1300)
NetR3_2: R3.2 U3.5 | length 1277.4
  Top w10: v2(530,1200) R3.2
  Bot Inner w10: v2(530,1200) 660,1070 660,770 820,610 1210,610 U3.5
NetR4_1: R4.1 U2.10 | length 486.1
  Top w10: U2.10 375,1588.79 380,1583.79 v2(380,1580) ; R4.1 v2(610,1300)
  Bot Inner w10: v2(380,1580) 610,1350 v2(610,1300)
NetR4_2: R4.2 U3.3 | length 957
  Top w10: v2(690,1200) R4.2
  Bot Inner w10: v2(690,1200) 690,790 840,640 1040,640 U3.3
NetR5_1: R5.1 U2.11 | length 1046.8
  Top w10: U2.11 425,1588.79 430,1583.79 v2(430,1580) ; R5.1 v2(1250,1300)
  Bot Inner w10: v2(430,1580) 600,1580 780,1400 1150,1400 v2(1250,1300)
NetR5_2: R5.2 U3.13 | length 203.8
  Top w10: U3.13 1310,1210 1310,1230 R5.2
NetR6_1: R6.1 U2.12 | length 540.3
  Top w10: U2.12 475,1548.79 480,1543.79 v2(480,1540) ; R6.1 v2(770,1300)
  Bot Inner w10: v2(480,1540) 720,1300 v2(770,1300)
NetR6_2: R6.2 U3.16 | length 170.7
  Top w10: R6.2 850,1150 U3.16
NetR7_1: R7.1 U2.13 | length 810.3
  Top w10: U2.13 525,1548.79 530,1543.79 v2(530,1540) ; R7.1 v2(1090,1300)
  Bot Inner w10: v2(530,1540) 590,1540 760,1370 1020,1370 v2(1090,1300)
NetR7_2: R7.2 U3.14 | length 179
  Top w13: U3.14 1170,1170 R7.2
NetR16_2: R16.2 R17.1 | length 148.3
  Top w10: R16.2 1130,326.77 1150,306.77 R17.1
NetR19_1: R19.1 U9.3 | length 137.1
  Top w25: U9.3 1000.69,2867.7 1000.69,2990.69 R19.1
NetR20_2: R20.2 U10.1 | length 165.4
  Top w10: R20.2 1200,2390 U10.1@1200,2512.99
NetR21_2: R21.2 U12.1 | length 157.1
  Top w10: U12.1 U12.1@1400.69,2492.3 ; U12.1@1400.69,2512.3 1400.69,2369.31 R21.2
NetU2_1: U2.1 U6.1 | length 261.7
  Top w10: U2.1 675,1841.54 765,1751.54 U6.1
NetU2_2: U2.2 U6.2 | length 353.2
  Top w10: v2(625,1801.22) U2.2 ; U6.2 v2(815,1696.81)
  Bot Inner w10: v2(625,1801.22) 710.59,1801.22 v2(815,1696.81)
NetU2_6: U2.6 U6.3 | length 627.1
  Top w10: v2(425,1801.22) U2.6 ; U6.3 v2(865,1696.81)
  Bot Inner w10: v2(425,1801.22) 453.78,1830 731.81,1830 v2(865,1696.81)
NetU2_7: U2.7 U6.15 | length 595
  Top w10: U2.7 v2(375,1921.22) ; U6.15 v2(815,1923.19)
  Bot Inner w10: v2(375,1921.22) 416.22,1880 771.81,1880 v2(815,1923.19)
NetU3_1: U3.1 U5.6 | length 1070.9
  Top w12: v2(1650,1330) 1650,1326.75 1655,1321.75 U5.6
  Bot Inner w12: U3.1 1470,1270 1630,1270 1650,1290 v2(1650,1330)
NetU3_2: U3.2 U5.3 | length 831.2
  Top w12: v2(1560,1210) 1560,1213.25 1565,1218.25 U5.3
  Bot Inner w12: U3.2 1340,1040 1430,1040 1560,1170 v2(1560,1210)
NetU3_6: U3.6 U7.6 | length 894.9
  Top w12: v2(1810,1330) 1810,1326.75 1815,1321.75 U7.6
  Bot Inner w12: U3.6 1670,970 1670,1250 1690,1270 1790,1270 1810,1290 v2(1810,1330)
NetU3_8: U3.8 U7.3 | length 596.2
  Top w12: v2(1720,1210) 1720,1213.25 1725,1218.25 U7.3
  Bot Inner w12: U3.8 1720,820 v2(1720,1210)
NetU5_2: U5.2 U6.4 | length 863.6
  Top w10: U6.4 915,1588.79 920,1583.79 v2(920,1580) ; v2(1530,1330) 1530,1276.5 1535.89,1270.61 1564.39,1270.61 U5.2
  Bot Inner w10: v2(920,1580) 1040,1460 1400,1460 v2(1530,1330)
NetU5_5: U5.5 U6.5 | length 904
  Top w10: U6.5 965,1588.79 970,1583.79 v2(970,1580) ; v2(1610,1330) 1610,1275.86 1615.86,1270 U5.5
  Bot Inner w10: v2(970,1580) 1012.24,1537.76 1060,1490 1450,1490 v2(1610,1330)
NetU6_6: U6.6 U7.2 | length 924
  Top w10: U6.6 1015,1588.79 1020,1583.79 v2(1020,1580) ; v2(1690,1330) 1690,1275.86 1695.86,1270 U7.2
  Bot Inner w10: v2(1020,1580) 1080,1520 1500,1520 v2(1690,1330)
NetU6_7: U6.7 U7.5 | length 964
  Top w10: U6.7 1065,1588.79 1070,1583.79 v2(1070,1580) ; v2(1770,1330) 1770,1275.86 1775.86,1270 U7.5
  Bot Inner w10: v2(1070,1580) 1100,1550 1550,1550 v2(1770,1330)
NetU9_1: U9.1 U14.1 | length 764.6
  Top w10: v2(1100,2800) U9.1 ; v2(1667.99,2648.78) U14.1
  Top Inner w10: v2(1100,2800) 1251.22,2648.78 v2(1667.99,2648.78)
NetU10_5: U10.5 U14.2 U14.3 | length 753.9
  Top w10: v2(1250,2800) U10.5 ; v2(1785,2715.79) U14.2 U14.3
  Top Inner w10: v2(1250,2800) 1334.21,2715.79 v2(1785,2715.79)
NetU11_3: U11.3 U12.3 | length 275.9
  Top w10: v2(1500,2430) U12.3 ; U11.3 1535.59,2286.5 1539.09,2290 1550,2290 v2(1580,2320)
  Bot Inner w10: v2(1500,2430) 1579.21,2350.79 1579.21,2320.79 v2(1580,2320)
NetU12_5: U12.5 U14.4 | length 603.9
  Top w10: v2(1450,2800) U12.5 ; U14.4 v2(1885,2715.79)
  Top Inner w10: v2(1450,2800) 1490,2760 1840.79,2760 v2(1885,2715.79)
POT_MEAS: C20.1 C21.1 R17.2 U1.7 | length 1660
  Top w10: R17.2 1290,290 C20.1 C21.1 v2(1370,440) ; U1.7 1427.14,1711.61 1450,1688.76 v2(1450,1650)
  Top Inner w10: v2(1370,440) 1355.47,454.53 1355.47,1425.47 1450,1520 v2(1450,1650)
RS485_N: J1.2 R23.2 R24.1 U14.7 | length 825.6
  Top w10: U14.7 1792.8,2879.02 1792.8,2902.35 1795,2904.56 1795,2975 R24.1 1795,3025 1795,3055 R23.2 1793,3103 1795,3103 1795,3128 v2(1793,3130)
  Top Inner w10: J1.2 1524.42,3380 1530.28,3374.14 1530.28,3287.3 1567.57,3250 1702,3250 1795,3157 1795,3132 v2(1793,3130)
RS485_P: J1.1 R24.2 R25.1 U14.6 | length 825.6
  Top w10: v2(1827,3130) 1825,3128 1825,3103 1827,3103 R25.1 1825,3055 1825,3025 R24.2 1825,2975 1825,2904.56 1827.2,2902.35 1827.2,2879.02 U14.6
  Top Inner w10: J1.1 1566.13,3380 1560.28,3374.14 1560.28,3299.72 1580,3280 1714.43,3280 1825,3169.43 1825,3132 v2(1827,3130)
RX_DATA: U1.3 U9.5 | length 841.5
  Top w10: v2(1050,2430) U9.5 ; v2(1320,1830) 1323.79,1830 1337.72,1816.07 1377.91,1816.07 U1.3
  Top Inner w10: v2(1050,2430) 1050,2100 v2(1320,1830)
SBWTCK: J2.5 U1.17 | length 862.5
  Top w10: v2(1560,1800) 1561.89,1800 1573.5,1788.39 U1.17
  Bot Inner w10: v2(1560,1800) 1640,1720 1800,1720 1980,1900 J2.5
SBWTDIO: C4.1 J2.3 R11.2 S5.1 S5.2 U1.16 | length 1016.5
  Top w10: v2(1560,1750.23) 1560.93,1750.23 1573.5,1762.8 U1.16 ; v2(1900,1620) S5.2 1912.5,1570 1927.5,1555 1927.5,1522.5 R11.2 C4.1 2074.14,1524.14 2074.14,1555 2089.14,1570 S5.1 2112.5,1570 2242.5,1700 J2.3
  Bot Inner w10: v2(1560,1750.23) 1560,1750 1620,1690 1830,1690 v2(1900,1620)
SHIFT_RCLK: U1.8 U6.11 | length 523.2
  Top w10: U6.11 v2(1015,1923.19) ; v2(1300,1710) 1323.98,1686.02 U1.8
  Bot Inner w10: v2(1015,1923.19) 1188.19,1750 1260,1750 v2(1300,1710)
SHIFT_SER: U1.10 U6.14 | length 715
  Top w10: U6.14 v2(865,1923.19) ; v2(1300,1610) 1324.84,1634.84 U1.10
  Bot Inner w10: v2(865,1923.19) 1178.19,1610 v2(1300,1610)
SHIFT_SRCLK: U1.9 U6.12 | length 583.5
  Top w10: U6.12 v2(965,1923.19) ; v2(1300,1660) 1300.22,1660.22 1379.78,1660.22 U1.9
  Bot Inner w10: v2@966.13,1924.13 1230.26,1660 v2(1300,1660)
SKIP_PUSH: C2.1 R9.2 S3.1 S3.2 U1.14 | length 2326.3
  Top w10: S3.1 662.5,310 677.5,325 677.5,357.5 R9.2 C2.1 ; v2(790,440) C2.1 ; S3.2 839.14,310 824.14,325 824.14,355.86 C2.1 ; v2(1530,1720) 1533.79,1720 1542.17,1711.61 U1.14
  Top Inner w10: v2(790,440) 1230,440 1250,460 1250,1020 1320,1090 1320,1440 1400,1520 1400,1650 1470,1720 v2(1530,1720)
TOGGLE_0: C5.1 R12.2 S1.3 U1.5 | length 1938.9
  Top w10: S1.3 250,1210 C5.1 R12.2 ; v2(1320,1770) 1323.79,1770 1330.99,1762.8 U1.5
  Top Inner w10: S1.3 250,1270 410,1430 1211.72,1430 1340,1558.28 1340,1750 v2(1320,1770)
TOGGLE_1: C6.1 R13.2 S1.1 U1.6 | length 2308.2
  Top w10: C6.1 R13.2 250,590 S1.1 ; U1.6 1381.4,1738.6 1438.6,1738.6 v2(1440,1740)
  Top Inner w10: S1.1 410,874.96 410,1378.18 431.82,1400 1230,1400 1370,1540 1370,1670 v2(1440,1740)
TX_DATA: U1.4 U11.5 | length 717.2
  Top w10: U1.4 1380.81,1789.19 1439.19,1789.19 v2(1440,1790) ; U11.5 1512.09,2362.91 1512.09,2338.79 1528.2,2322.68 1537.32,2322.68 v2(1540,2320)
  Bot Inner w10: v2(1440,1790) 1413,1817 1413,2113 1540,2240 v2(1540,2320)
TX_RXn_EN: U1.2 U11.2 | length 553
  Top w10: U1.2 1380.22,1839.78 1439.78,1839.78 v2(1440,1840) ; U11.2 1512.09,2272.91 1512.09,2239.34 v2(1544.81,2206.63)
  Bot Inner w10: v2(1440,1840) 1440,2101.82 v2(1544.81,2206.63)
VCC: C7.1 C14.1 C17.1 C18.1 C19.1 J1.5 R23.1 U8.2 U10.6 U12.6 U14.8 | length 831.6
  Top w25: U8.2 703.25,2896.83 703.25,3073.25 C7.1 v2(710,3130) ; U10.6 1200.69,2867.7 1200.69,2990.69 C18.1 v2(1210,3050) ; U12.6 1400.69,2867.7 1400.69,2990.69 C19.1 v2(1410,3050) ; v2(1600,2920) C17.1 1662.5,2907.5 1698.72,2907.5 1715.02,2891.2 1734.7,2891.2 1735,2890.91 U14.8 ; R23.1 v2(1690,3130)
VDD: C8.1 C9.1 C10.1 C11.1 C12.1 C13.1 C15.1 C16.1 J2.1 R8.1 R9.1 R10.1 R11.1 R12.1 R13.1 R14.1 R15.1 R16.1 R18.1 R20.1 R21.1 R22.1 U1.1 U2.3 U2.4 U2.16 U6.10 U6.13 U6.16 U8.5 U9.6 | length 3115
  Top w10: U2.4 v2(525,1921.22) ; U2.3 v2(575,1921.22) ; U6.13 v2(915,1923.19) ; U6.10 v2(1065,1923.19)
  Top w13: U1.1 1362,1865.16 1360,1867.16 1360,1971.82 1405.68,2017.5 1407.5,2017.5 C11.1 C10.1 C9.1
  Top w25: v2(100,2640) R18.1 C15.1 C8.1 420,2640 500,2560 U8.5 ; v2(180,1710) C13.1 630.88,1710 674.7,1666.17 674.7,1639.07 U2.16 ; v2(370,500) R13.1 ; R12.1 v2(370,1300) ; v2(580,390) R9.1 ; U6.16 765.3,1862.89 765.3,1835.8 811.09,1790 C12.1 v2(1260,1790) ; v2(1000,390) R16.1 ; v2(1090,2310) C16.1 1099.31,2369.31 U9.6@1099.31,2512.3 ; U9.6@1099.31,2492.3 U9.6 ; v2(1170,2230) R20.1 ; R22.1 v2(1250,2410) ; v2(1410,2230) R21.1 ; v2(1580,390) R10.1 ; C9.1 v2(1670,2030) ; v2(1880,1440) R11.1 ; R8.1 v2(1880,2060) ; v2(2210,730) R15.1 ; v2(2290,730) R14.1
XIN: U1.19 X1.1 | length 105.4
  Top w10: U1.19 1701.64,1839.57 1714.58,1852.5 X1.1
XOUT: U1.18 X1.2 | length 105.9
  Top w10: U1.18 1706.76,1813.98 1720,1800.74 X1.2@1720,1800.34
pads on no net: M1.1 M2.1 M3.1 M4.1 U3.4 U3.7 U3.9 U6.9 U8.8 U9.2 U10.2 U12.2
copper on no net:
  other v3: 250,155.5 2250,155.5 183.18,183.18 316.82,183.18 2183.18,183.18 2316.82,183.18 155.5,250 344.5,250 2155.5,250 2344.5,250 183.18,316.82 316.82,316.82 2183.18,316.82 2316.82,316.82 250,344.5 2250,344.5 250,3155.5 2250,3155.5 183.18,3183.18 316.82,3183.18 2183.18,3183.18 2316.82,3183.18 155.5,3250 344.5,3250 2155.5,3250 2344.5,3250 183.18,3316.82 316.82,3316.82 2183.18,3316.82 2316.82,3316.82 250,3344.5 2250,3344.5

## Polygon pours and split planes (outlines as drawn)
ISO on Bot "ISO_L04_P000" (solid, remove dead copper, pour order 0): 550,3500 550,2600 2500,2600 2500,3500
GND on Bot "GND_L04_P001" (solid, remove dead copper, pour order 1): 2500,2590 2500,0 0,0 0,3500 540,3500 540,2590
ISO on Top "ISO_L01_P006" (solid, remove dead copper, pour order 6): 550,3500 550,2600 2500,2600 2500,3500
GND on Top "GND_L01_P008" (solid, remove dead copper, pour order 8): 2500,2590 2500,0 0,0 0,3500 540,3500 540,2590
VCC on Bot Inner "VCC_L03_P004" (solid, remove dead copper, pour order 4): 550,3500 550,2600 2500,2600 2500,3500
VDD on Bot Inner "VDD_L03_P010" (solid, remove dead copper, pour order 10): 2500,2590 2500,0 0,0 0,3500 540,3500 540,2590
ISO on Top Inner "ISO_L02_P007" (solid, remove dead copper, pour order 7): 550,3500 550,2600 2500,2600 2500,3500
GND on Top Inner "GND_L02_P009" (solid, remove dead copper, pour order 9): 2500,2590 2500,0 0,0 0,3500 540,3500 540,2590

## Other copper
Top:
  pour cut-out: 1660,1840 1380,1840 1380,1990 1660,1990
  pour cut-out: 1250,1590 1090,1590 1090,1750 1250,1750
  pour cut-out: 190,1910 350,1910 350,1750 190,1750
  pour cut-out: 1130,2320 970,2320 970,2540 1130,2540
  pour cut-out: 110,2950 550,2950 550,2680 110,2680
  pour cut-out: 1910,2790 1910,2960 1610,2960 1610,2790
  pour cut-out: 1170,2820 1170,3040 1530,3040 1530,2820
  pour cut-out: 670,3120 830,3120 830,2840 670,2840
Bot Inner:
  pour cut-out: 798.56,1820 798.56,1890 1041.44,1890 1041.44,1820
  pour cut-out: 1800,1455 1800,1670 1830,1670 1830,1455
  pour cut-out: 1298.56,1770 1298.56,1840 1541.44,1840 1541.44,1770
  pour cut-out: 1750,1190 1750,1220 1850,1220 1850,1190
  pour cut-out: 480,1230 480,1300 510,1300 510,1230
  pour cut-out: 330,1610 330,1900 360,1900 360,1610

## Silkscreen, mask and mechanical layers (free items; w line width, h text height)
Top Overlay:
  lines w7.5: 1850,2500 1850,2400 2450,2400 2450,2500
  text "5V" at 1979.99,2460 h60 r90
  text "GND" at 2079.99,2460 h60 r90
  text "GND" at 2179.99,2460 h60 r90
  text "RS485-" at 2279.99,2460 h60 r90
  text "RS485+" at 2379.99,2460 h60 r90
  text "Osborne / Electrical / Engineering" at 125,2150 h120
  text "BOOT" at 1893.59,2080.01 h60
  text "www.osborneee.com" at 125.08,2075.67 h90
  text "GND" at 2326,1980 h40
  text "TCK" at 2326,1880 h40
  text "GND" at 2326,1780 h40
  text "TDIO" at 2326,1680 h40
  text "GND" at 2326,1580 h40
  text "3V3" at 2326,1480 h40
  text "github.com/amosborne/modbus-rs485-demo" at 100,1438.16 h90
  text "RESET" at 1879.45,1360.01 h60
  text "SKIP" at 670.3,45.01 h60
  text "APPLY" at 1623.46,45.01 h60
Bottom Overlay:
  text "JLCJLCJLCJLC" at 2173,57 h30
Board Shape:
  the board outline again, w10